# Altium PCB FPC-SMD_P0.5-30P_F0501WR-S-30P.pcbdoc
Units mm, origin at the board's own origin, x right, y up, seen from the top; angles counter-clockwise.
Board outline 34.02 x 18.04 mm, 2 copper layers (Top Layer, Bottom Layer); 1 components, 0 nets, 32 pads, 0 vias.
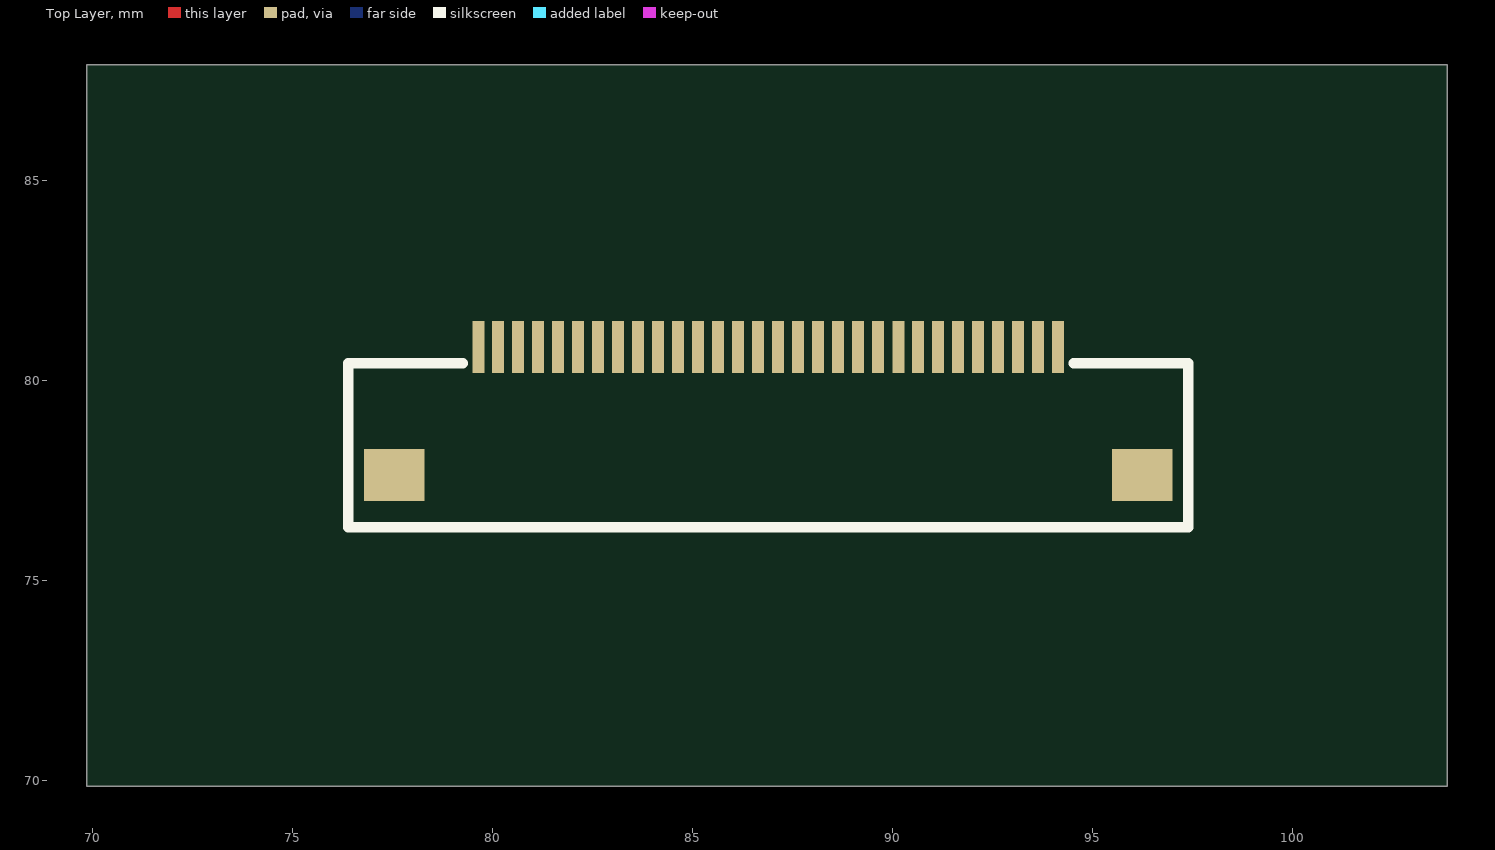
[diagram p0: Top Layer view]
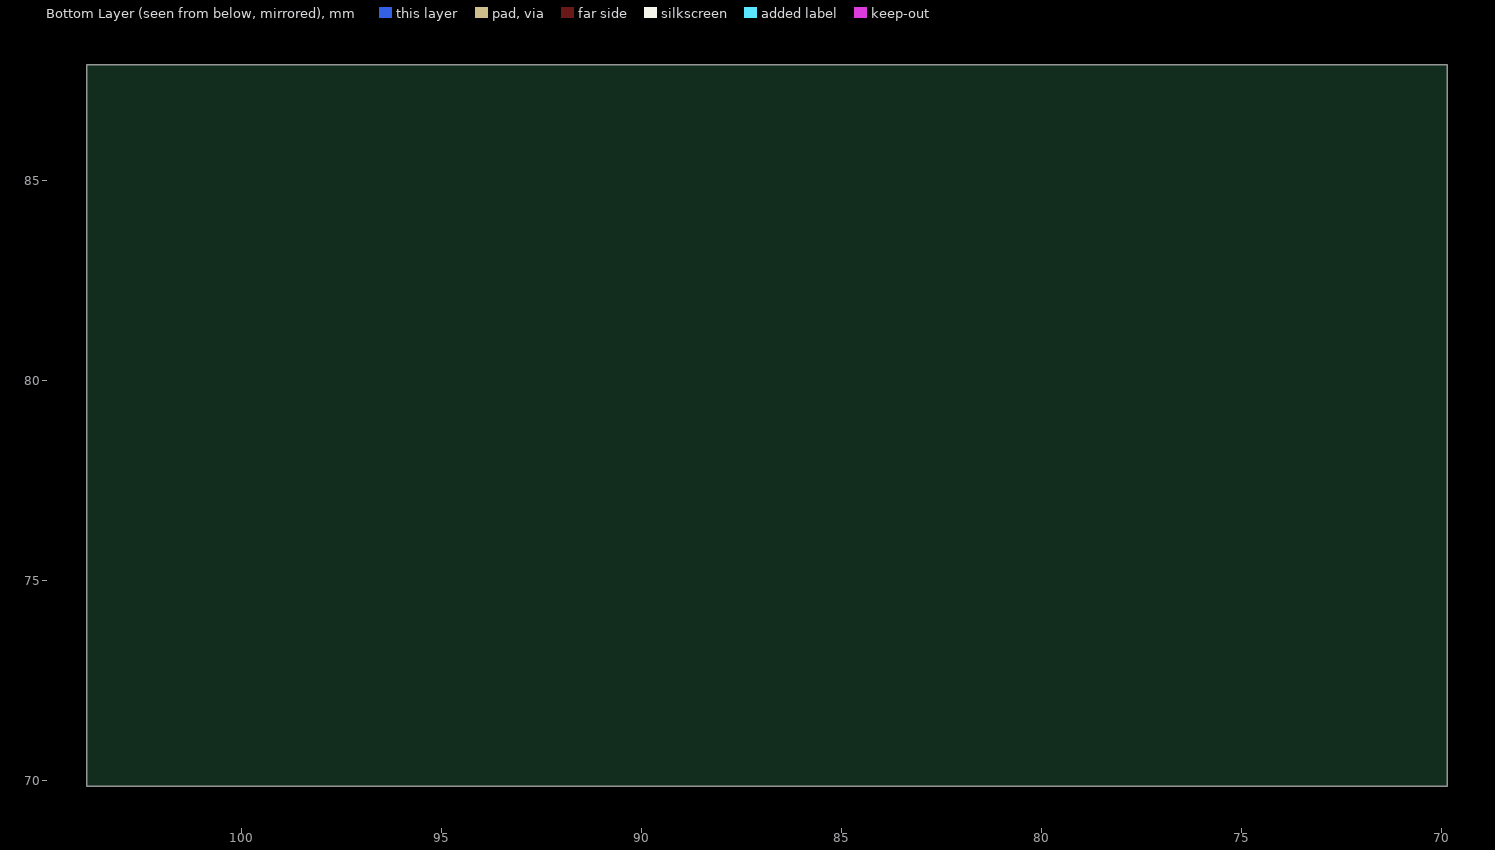
[diagram p1: Bottom Layer view, seen from below]

## Layer stack, top to bottom
Top Solder: solder mask 0.0102, Solder Resist, Dk 3.5
Top Layer: signal copper 0.0356
Dielectric 1: dielectric 0.32, FR-4, Dk 4.8
Bottom Layer: signal copper 0.0356
Bottom Solder: solder mask 0.0102, Solder Resist, Dk 3.5

## Board outline
103.866,69.85 69.85,69.85 69.85,87.889 103.866,87.889

## Components (designator, comment, footprint, x,y, rotation, side; value= is the part's Value field where it differs from the comment)
? "FPC-SMD_P0.5-30P_F0501WR-S-30P" FPC-SMD_P0.5-30P_F0501WR-S-30P 86.888,79.228 r0 top

## Footprints (in the part's own frame and the unit in brackets; to place one, negate y for a bottom-side part, rotate by r counter-clockwise, add the part's x,y. Pads: shape width x height; smd on the part's side, far side on the other; paste and mask are expansions set on the pad)
FPC-SMD_P0.5-30P_F0501WR-S-30P [mil]
  rect 11.8x51.2 smd: 1(-285.4,63) 2(-265.8,63) 3(-246.1,63) 4(-226.5,63) 5(-206.8,63) 6(-187.1,63) 7(-167.4,63) 8(-147.7,63) 9(-128,63) 10(-108.3,63) 11(-88.7,63) 12(-69,63) 13(-49.3,63) 14(-29.6,63) 15(-9.9,63) 16(9.8,63) 17(29.5,63) 18(49.1,63) 19(68.8,63) 20(88.5,63) 21(108.2,63) 22(128,63) 23(147.6,63) 24(167.2,63) 25(186.9,63) 26(206.6,63) 27(226.3,63) 28(246,63) 29(265.7,63) 30(285.4,63)
  rect 59.1x51.2 smd: 31(-368.1,-63) 32(368.1,-63)
  silkscreen extent -413,-114 413,47

## Nets (pads, with @x,y where several pads share a name; then routed paths per layer and width w, separated by ;. In a path a pad name is that pad's centre, name@x,y a point inside that pad or via, vN(x,y) a via of type N, cw(c..) or ccw(c..) an arc to the next point about the centre after c; other vN are vias at no path point)
pads on no net: ?.1 ?.2 ?.3 ?.4 ?.5 ?.6 ?.7 ?.8 ?.9 ?.10 ?.11 ?.12 ?.13 ?.14 ?.15 ?.16 ?.17 ?.18 ?.19 ?.20 ?.21 ?.22 ?.23 ?.24 ?.25 ?.26 ?.27 ?.28 ?.29 ?.30 ?.31 ?.32